# Altium PCB MotorConnect.PcbDoc
Units mil, origin at the board's own origin, x right, y up, seen from the top; angles counter-clockwise.
Board outline 3800 x 2345 mil, 2 copper layers (Top Layer, Bottom Layer); 6 components, 6 nets, 16 pads, 44 vias.
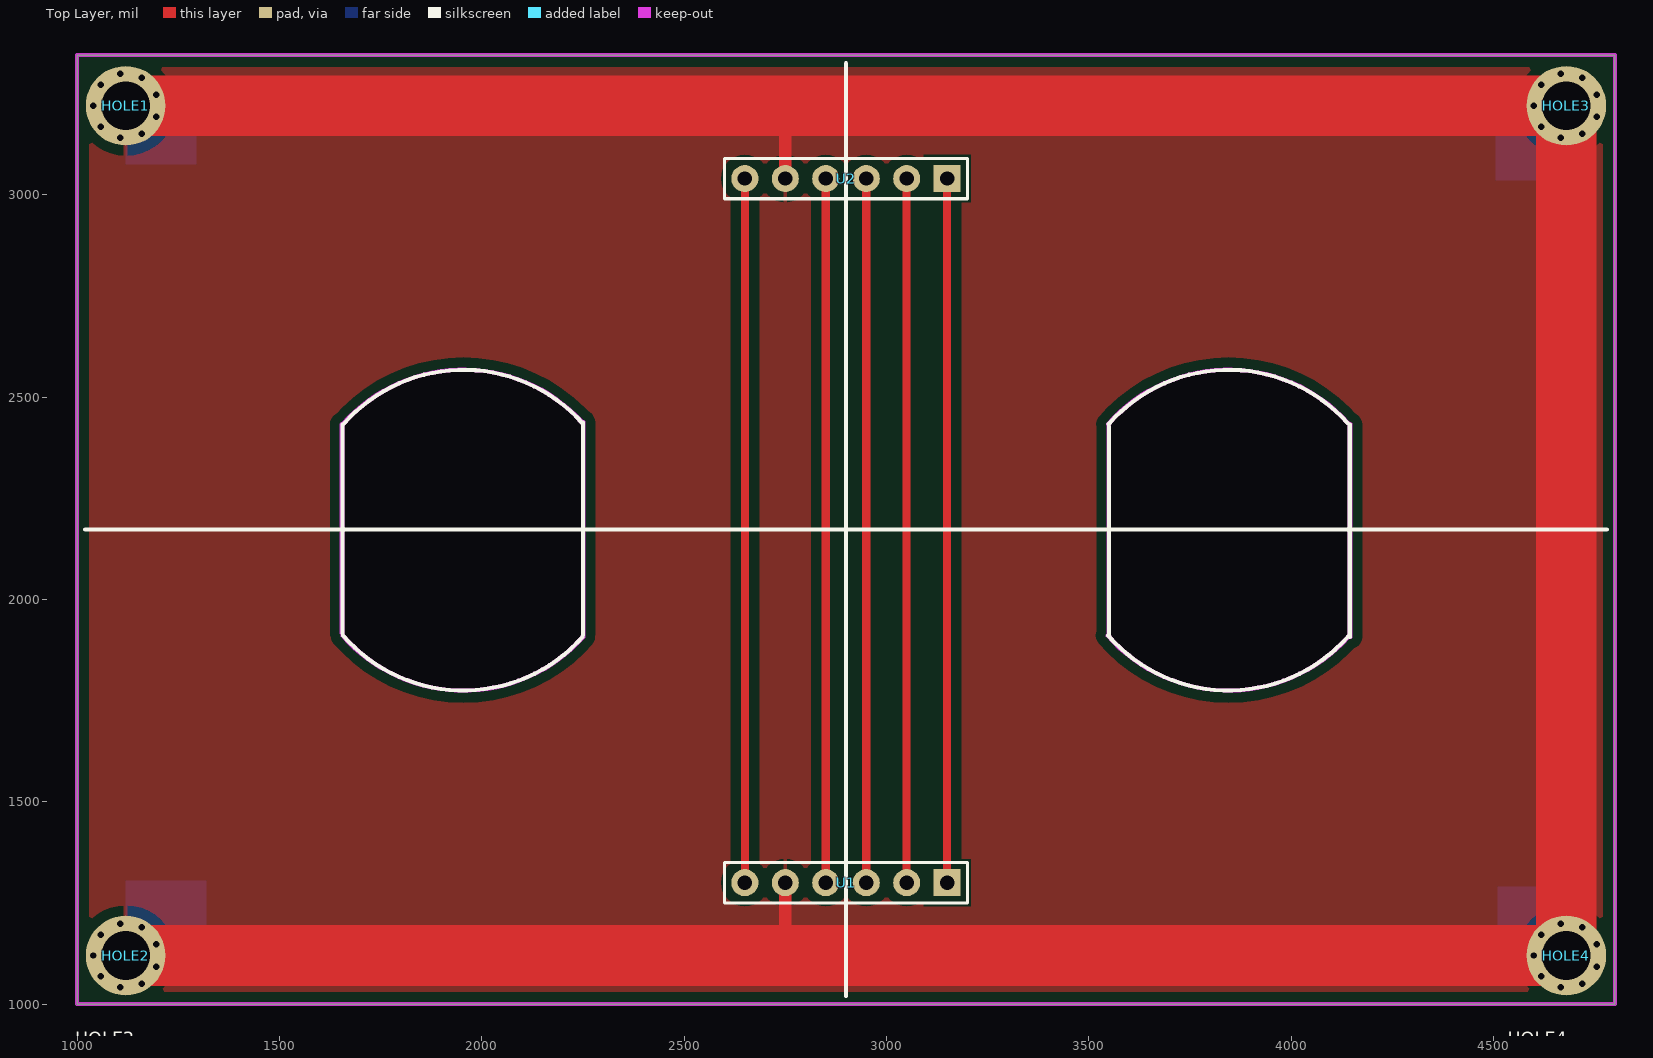
[diagram p0: Top Layer view]
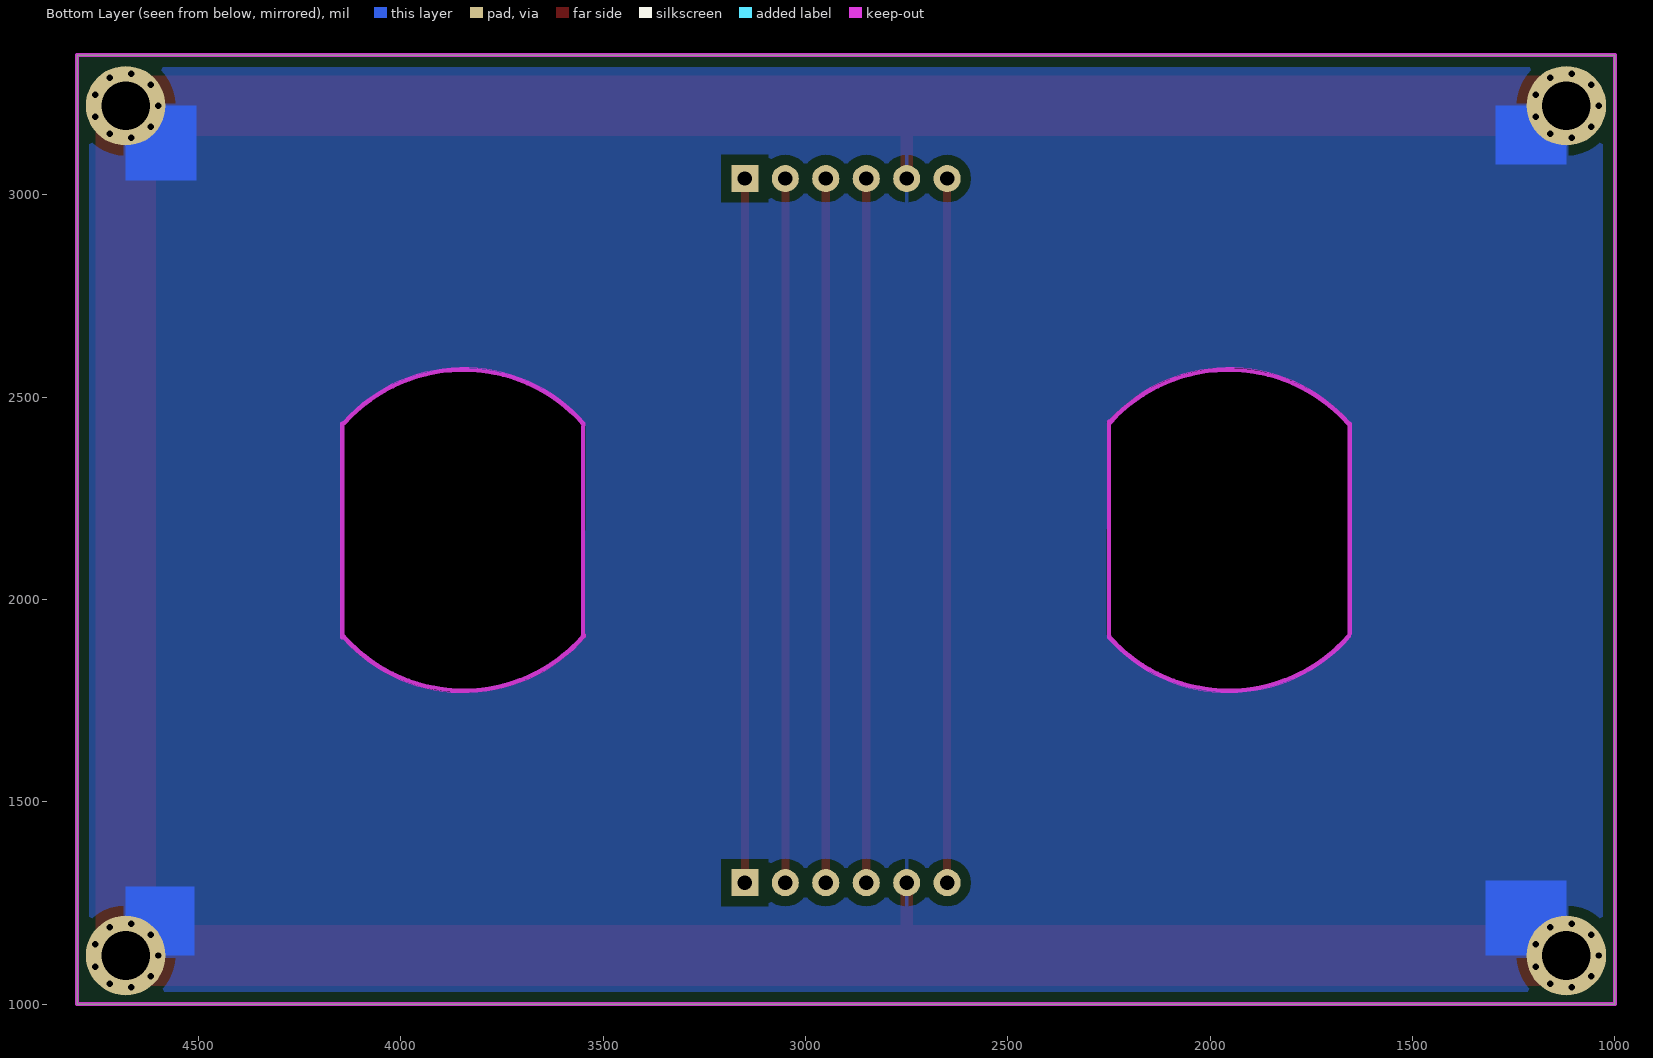
[diagram p1: Bottom Layer view, seen from below]

## Layer stack, top to bottom
Top Layer: signal copper 1.4
Dielectric: dielectric 12.6, FR-4, Dk 4.8
Bottom Layer: signal copper 1.4

## Board outline
1000,3345 1000,1000 4800,1000 4800,3345
cut-out: 1653.4,1907.36 cw(c1657.18,1910.64) 1652.83,1913.13 cw(c1655.29,1917.5) 1650.28,1917.5 1650.28,2432.5 cw(c1655.29,2432.5) 1655.45,2437.51 cw(c1954.5,2173.8) 2249.11,2442.47 cw(c2249.78,2437.5) 2254.79,2437.5 2254.79,1912.5 cw(c2249.78,1912.5) 2253.96,1909.74 cw(c2249.34,1907.81) 2254.35,1907.81 cw(c2249.34,1907.81) 2253.09,1904.48 cw(c1954.5,2168.72)
cut-out: 3544.23,1907.36 cw(c3548.01,1910.64) 3545.43,1914.95 3545.43,2427.42 cw(c3550.45,2427.42) 3545.88,2429.49 cw(c3549.21,2433.24) 3545.44,2436.55 cw(c3845.33,2173.8) 4142.72,2439.39 cw(c4138.98,2436.04) 4143.83,2437.31 cw(c4144.94,2432.42) 4149.95,2432.42 4149.95,1907.42 cw(c4144.94,1907.42) 4142.59,1902.99 cw(c3845.33,2168.72)

## Design rules (kind name [scope] priority, off if disabled: settings)
Clearance [All] p1: gap=25
PolygonConnect [All] p1: connectstyle=Relief reliefconductorwidth=10 reliefentries=4 polygonreliefangle="90 Angle"
RoutingVias [All] p1: holewidth=28 width=50 viastyle="Through Hole" minholewidth=28 minwidth=50 maxholewidth=280 maxwidth=500
SilkscreenOverComponentPads [All] p1: minsilkscreentomaskgap=10
SolderMaskExpansion [All] p1: expansion=4
TestPointUsage [All] p1: valid=0 allowmultiple=FALSE
Testpoint [All] p1: side=15 testpointundercomponent=TRUE minsize=40 maxsize=100 preferedsize=60 minholesize=0 maxholesize=40 preferedholesize=32 testpointgrid=1 style=1023 order=0-112345678
Width [All] p1: maxlimit=200 minlimit=10 preferedwidth=10 minimp=50.000000 maximp=50.000000 favimp=50.000000
23 further rules are at their usual default settings.

## Components (designator, comment, footprint, x,y, rotation, side; value= is the part's Value field where it differs from the comment)
HOLE1 "HOLE" HOLE-M3 1120,3220 r0 top
HOLE2 "HOLE" HOLE-M3 1120,1120 r0 top
HOLE3 "HOLE" HOLE-M3 4680,3220 r0 top
HOLE4 "HOLE" HOLE-M3 4680,1120 r0 top
U1 "ATK MODULE" HDR2.54-M-LI-6P 2900,1300 r180 top
U2 "ATK MODULE" HDR2.54-M-LI-6P 2900,3040 r180 top

## Footprints (in the part's own frame and the unit in brackets; to place one, negate y for a bottom-side part, rotate by r counter-clockwise, add the part's x,y. Pads: shape width x height; smd on the part's side, far side on the other; paste and mask are expansions set on the pad)
HDR2.54-M-LI-6P [mm] "排母，6脚"
  rect 1.7x1.7 hole 0.9: 1(-6.35,0)
  round 1.7 hole 0.9: 2(-3.81,0) 3(-1.27,0) 4(1.27,0) 5(3.81,0) 6(6.35,0)
  silkscreen extent -7.62,-1.27 7.62,1.27, body extent -7.62,-1.27 7.62,1.27, height 8.5
HOLE-M3 [mm]
  round 5 hole 3.05: 1(0,0)

## Part data
U1 U2: library part ATK-HC05, "ATK-HC05"

## Via types
v1: diameter 28, hole 16, Top Layer to Bottom Layer, 44 vias

## Nets (pads, with @x,y where several pads share a name; then routed paths per layer and width w, separated by ;. In a path a pad name is that pad's centre, name@x,y a point inside that pad or via, vN(x,y) a via of type N, cw(c..) or ccw(c..) an arc to the next point about the centre after c; other vN are vias at no path point)
NetHOLE1_1: HOLE1.1 HOLE2.1 HOLE3.1 HOLE4.1 U1.5 U2.5 | length 9575
  Top Layer w30: 2750,1125 U1.5 ; U2.5 2750,3220
  Top Layer w150: HOLE2.1 HOLE4.1 HOLE3.1 2750,3220 HOLE1.1
  other v1: 1106.11,1041.22 4666.11,1041.22 1160,1050.72 4720,1050.72 1058.72,1068.58 4618.72,1068.58 1195.18,1092.64 4755.18,1092.64 1040,1120 1040,1120 1040,1120 4600,1120 4600,1120 4600,1120 1195.18,1147.36 4755.18,1147.36 1058.72,1171.42 4618.72,1171.42 1160,1189.28 4720,1189.28 1106.11,1198.78 4666.11,1198.78 1106.11,3141.22 4666.11,3141.22 1160,3150.72 4720,3150.72 1058.72,3168.58 4618.72,3168.58 1195.18,3192.64 4755.18,3192.64 1040,3220 1040,3220 1040,3220 4600,3220 4600,3220 4600,3220 1195.18,3247.36 4755.18,3247.36 1058.72,3271.42 4618.72,3271.42 1160,3289.28 4720,3289.28 1106.11,3298.78 4666.11,3298.78
NetU1_6: U1.6 U2.6 | length 1740
  Top Layer w20: U1.6 U2.6
P1: U1.1 U2.1 | length 1740
  Top Layer w20: U1.1 U2.1
P2: U1.2 U2.2 | length 1740
  Top Layer w20: U1.2 U2.2
P3: U1.3 U2.3 | length 1740
  Top Layer w20: U1.3 U2.3
P4: U1.4 U2.4 | length 1740
  Top Layer w20: U1.4 U2.4

## Polygon pours and split planes (outlines as drawn)
NetHOLE1_1 on Top Layer "Top Layer-No Net" (solid, remove dead copper, pour order 1000): 1000,3345 1000,1000 4800,1000 4800,3345
NetHOLE1_1 on Bottom Layer "Top Layer-No Net" (solid, remove dead copper, pour order 1001): 1000,3345 1000,1000 4800,1000 4800,3345

## Keep-outs
Keep-Out Layer:
  lines w10: 1655.29,1917.5 1655.29,2432.5 ; 1657.18,1910.64 ccw(c1954.5,2168.72) 2249.34,1907.81 ; 1658.38,2433.24 cw(c1954.5,2173.8) 2248.15,2436.04 ; 2249.78,1912.5 2249.78,2437.5 ; 3548.01,1910.64 ccw(c3845.33,2168.72) 4140.16,1907.81 ; 3549.21,2433.24 cw(c3845.33,2173.8) 4138.98,2436.04 ; 3550.45,1912.42 3550.45,2427.42 ; 4144.94,1907.42 4144.94,2432.42 ; 1000,1000 1000,3345 4800,3345 4800,1000 1000,1000

## Other copper
Bottom Layer:
  rectangle net NetHOLE1_1: 1120,3075 1295,3220
  rectangle net NetHOLE1_1: 1120,1120 1320,1305
  rectangle net NetHOLE1_1: 4510,1120 4680,1290
  rectangle net NetHOLE1_1: 4505,3035 4680,3220

## Silkscreen, mask and mechanical layers (free items; w line width, h text height)
Top Overlay:
  lines w10: 1020,2172.53 4780,2172.53 ; 1655.29,1917.5 1655.29,2432.5 ; 1657.18,1910.64 ccw(c1954.5,2168.72) 2249.34,1907.81 ; 1658.38,2433.24 cw(c1954.5,2173.8) 2248.15,2436.04 ; 2249.78,1912.5 2249.78,2437.5 ; 2900,1020 2900,3325 ; 3548.01,1910.64 ccw(c3845.33,2168.72) 4140.17,1907.81 ; 3549.21,2433.24 cw(c3845.33,2173.8) 4138.98,2436.04 ; 3550.45,1912.42 3550.45,2427.42 ; 4144.94,1907.42 4144.94,2432.42
Top Solder:
  drawing of 10676 lines, arcs and shapes, not listed
  text "Lovelessing..." at 3225,2765 h280
  text "2019.12.30" at 3868.69,1495 h180
  text "V1.0" at 4340,1305 h180
  text "STM32平衡小车连接底座" at 2725,1080 h180
Bottom Solder:
  drawing of 10676 lines, arcs and shapes, not listed

## Dimensions
1954.5,2567.5 to 1954.5,1775.02 on Top Overlay
4144.94,2432.42 to 2900,3325 on Top Overlay
1655.29,2432.5 to 2900,3325 on Top Overlay
3550.45,2427.42 to 2900,3325 on Top Overlay
2249.78,2437.5 to 2900,3325 on Top Overlay
2249.78,1912.5 to 3550.45,1912.42 on Top Overlay
1000,1000 to 1000,3345 on Top Overlay
1000,3345 to 4800,3345 on Top Overlay
1655.29,1917.5 to 4144.94,1907.42 on Top Overlay